# Altium PCB 2004 LCD.PcbDoc
Units mil, origin at the board's own origin, x right, y up, seen from the top; angles counter-clockwise.
Board outline 10000 x 5300 mil, 2 copper layers (Top Layer, Bottom Layer); 9 components, 35 nets, 157 pads, 34 vias.
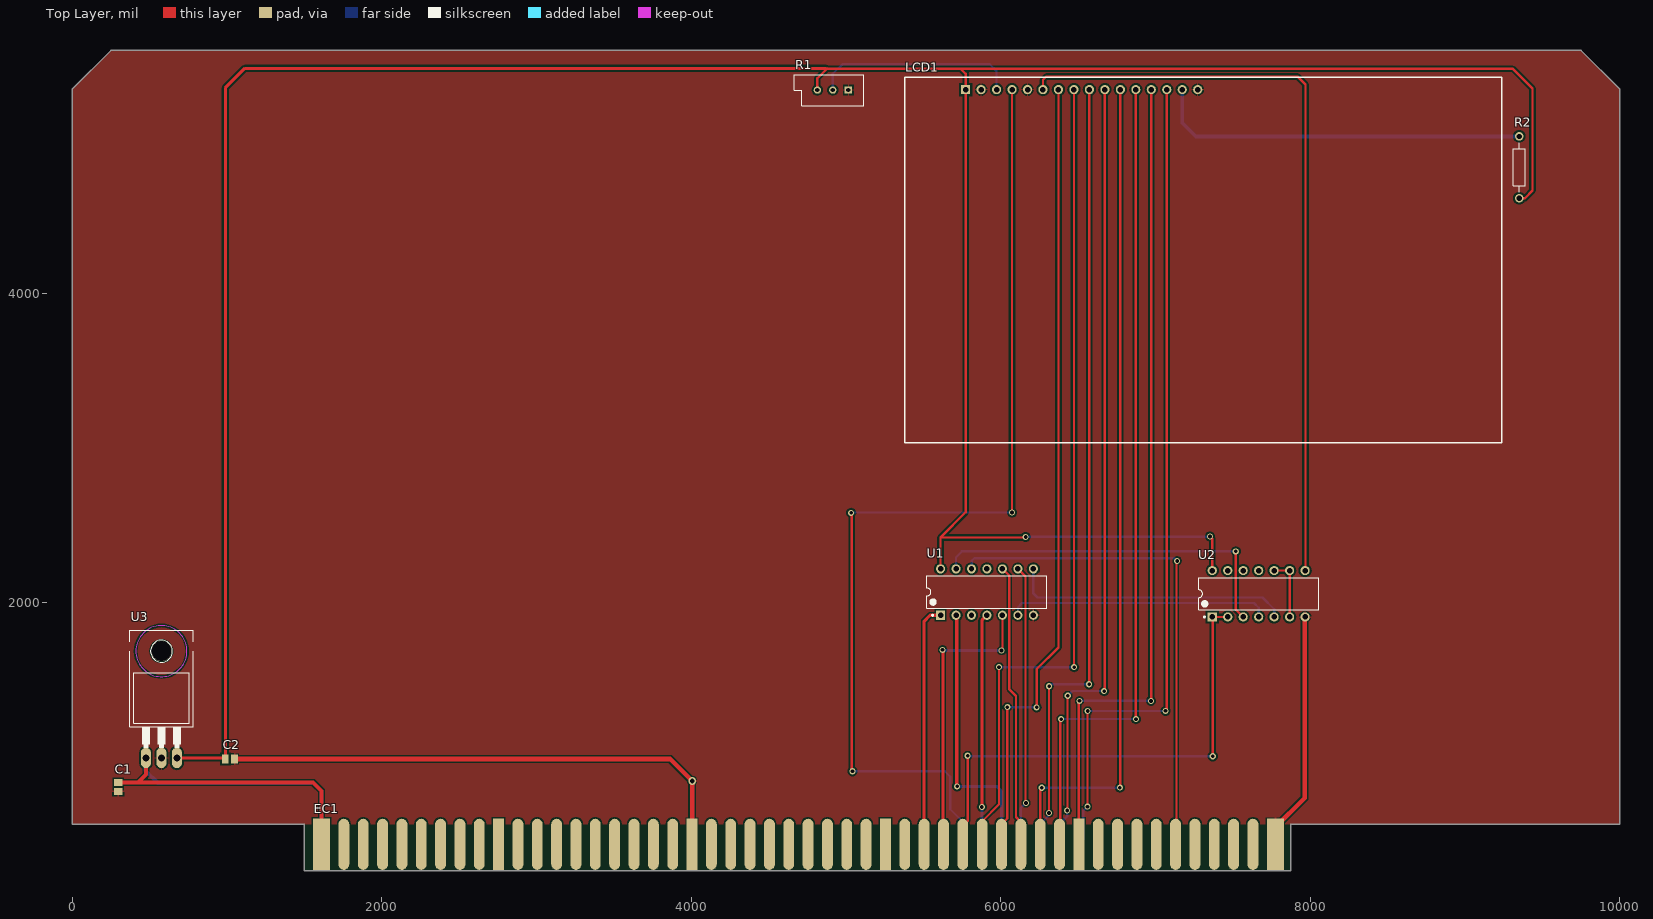
[diagram p0: Top Layer view]
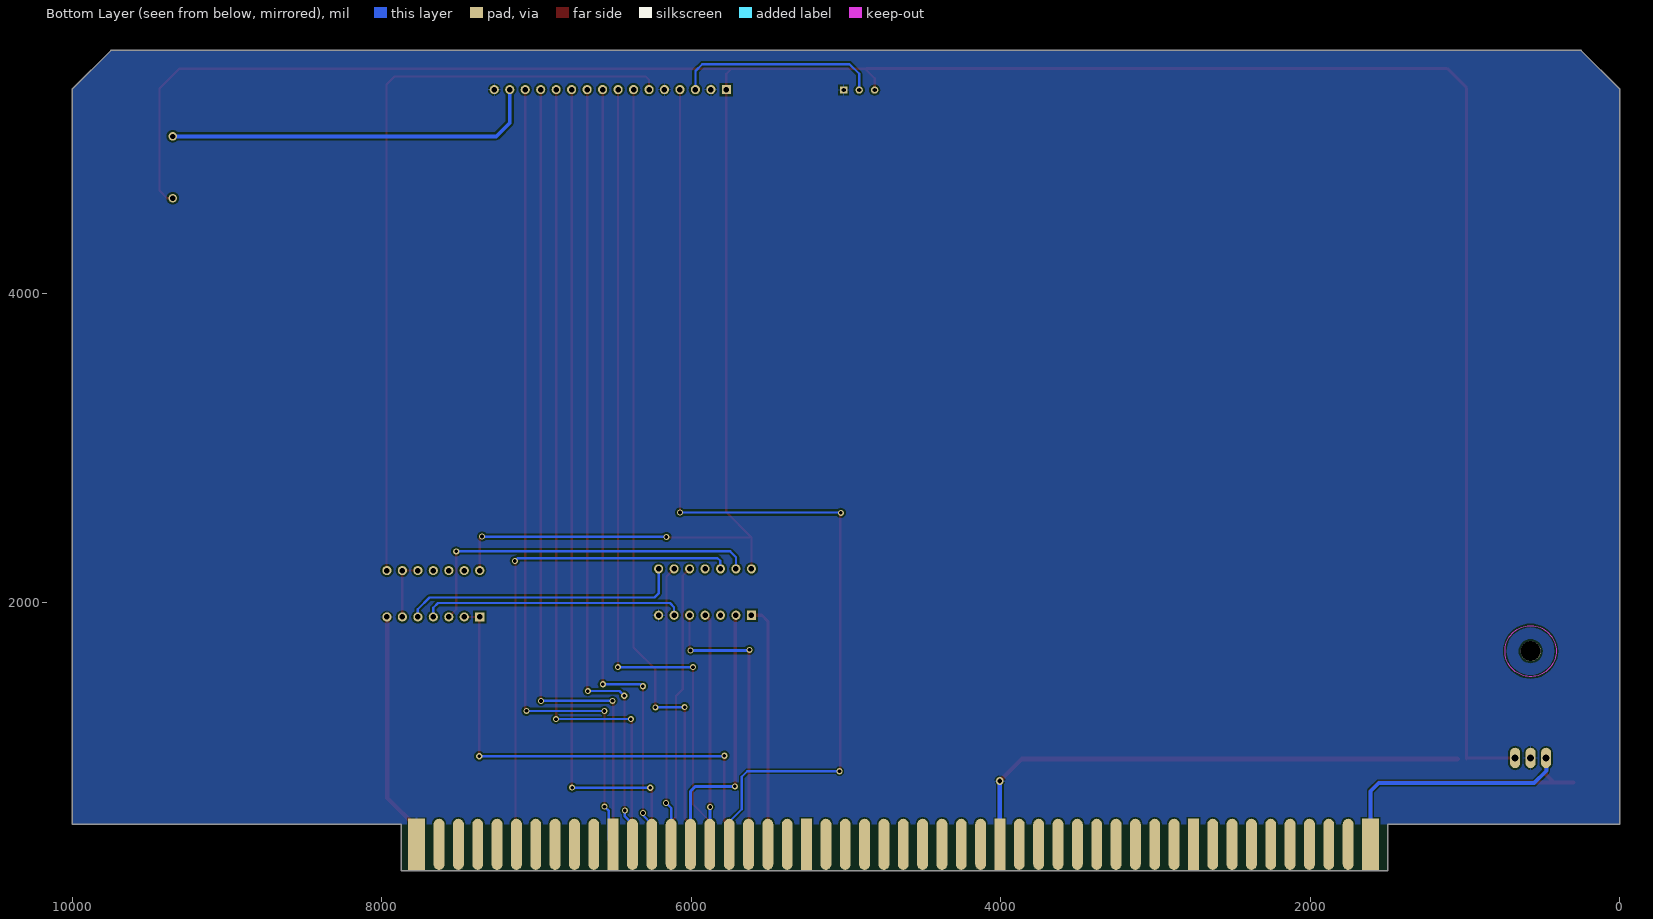
[diagram p1: Bottom Layer view, seen from below]

## Layer stack, top to bottom
Top Solder: solder mask 0.4, Solder Resist, Dk 3.5
Top Layer: signal copper 1.4
Dielectric 1: dielectric 12.6, FR-4, Dk 4.8
Bottom Layer: signal copper 1.4
Bottom Solder: solder mask 0.4, Solder Resist, Dk 3.5

## Board outline
0,570 1500,570 1500,270 7875,270 7875,570 10000,570 10000,5320 9750,5570 250,5570 0,5320

## Design rules (kind name [scope] priority, off if disabled: settings)
Clearance [All] p1: gap=8 ignorepadtopadclearanceinfootprint=TRUE except(12: Arc-Fill Arc-Poly Arc-Region Track-Fill Track-Poly Track-Region SMDPad-Fill SMDPad-Poly SMDPad-Region THPad-Fill THPad-Poly THPad-Region Via-Fill Via-Poly Via-Region Fill-Fill Fill-Poly Fill-Region Poly-Poly Poly-Region Region-Region)
PolygonConnect [All] p1: connectstyle=Relief reliefconductorwidth=10 reliefentries=4 polygonreliefangle="90 Angle" airgapwidth=10
RoutingVias [All] p1: holewidth=15.75 width=31.5 viastyle="Through Hole" minholewidth=11.81 minwidth=19.68 maxholewidth=78.74 maxwidth=50
SolderMaskExpansion [All] p1: expansion=4
Width "MCU Width" [WithinRoom('MCU')] p1: maxlimit=8 minlimit=6 preferedwidth=8
Width [All] p2: maxlimit=50 minlimit=8 preferedwidth=30
30 further rules are at their usual default settings.

## Components (designator, comment, footprint, x,y, rotation, side; value= is the part's Value field where it differs from the comment)
C1 "Cap Pol3" C0805 297,810 r270 top value=100pF
C2 "Cap Pol3" C0805 1018.53,991 r0 top value=100pF
EC1 "S100 Connector" S100 1610,440 r0 top locked
LCD1 "2004 LCD" 2004LCD 5773,5317 r0 top
R1 "RPot" VR5 4915,5314 r180 top value=1K
R2 "Res2" AXIAL-0.4 9351,4815 r90 top value=1K
U1 "SN74LS21N" N0014A 5911,2070 r90 top
U2 "SN74LS00N" N0014A 7667,2059 r90 top
U3 "LM7805" *TO220 576,1248 r0 top

## Footprints (in the part's own frame and the unit in brackets; to place one, negate y for a bottom-side part, rotate by r counter-clockwise, add the part's x,y. Pads: shape width x height; smd on the part's side, far side on the other; paste and mask are expansions set on the pad)
2004LCD [mm]
  rect 1.5x1.5 hole 0.9: 1(0,0)
  round 1.5 hole 0.9: 2(2.54,0) 3(5.08,0) 4(7.62,0) 5(10.16,0) 6(12.7,0) 7(15.24,0) 8(17.78,0) 9(20.32,0) 10(22.86,0) 11(25.4,0) 12(27.94,0) 13(30.48,0) 14(33.02,0) 15(35.56,0) 16(38.1,0)
  silkscreen extent -10,-58 88,2
*TO220 [mil]
  oval 66x132 hole 44: 1(-100,-250) 2(0,-250) 3(100,-250)
  round 130 hole 130 unplated: None(0,440)
  Keep-Out Layer circle w0: c0,440 r165
  Keep-Out Layer circle w0: c0,440 r165
  Keep-Out Layer circle w0: c0,440 r165
  Keep-Out Layer circle w0: c0,440 r165
  Keep-Out Layer circle w0: c0,440 r165
  Keep-Out Layer circle w0: c0,440 r165
  silkscreen extent -205,-185 205,575
AXIAL-0.4 [mm] "Axial Device, Thru-Hole; 2 Leads; 0.4 in Pin Spacing"
  round 1.4 hole 0.85: 1(-5.08,0) 2(5.08,0)
  silkscreen extent -4.06,-1.02 4.06,1.02
C0805 [mm] "Chip Capacitor, Body 2.0x1.3mm, IPC High Density"
  rect 1.1x1.4 smd: 1(-0.75,0) 2(0.75,0)
  body extent -1.1,-0.72 1.1,0.72, height 1.4
N0014A [mm] "DIP, 14-Leads, Body 19.7x6.6mm, Pitch 2.54mm"
  rect 1.5x1.5 hole 0.9: 1(-3.81,7.62)
  round 1.5 hole 0.9: 2(-3.81,5.08) 3(-3.81,2.54) 4(-3.81,0) 5(-3.81,-2.54) 6(-3.81,-5.08) 7(-3.81,-7.62) 8(3.81,-7.62) 9(3.81,-5.08) 10(3.81,-2.54) 11(3.81,0) 12(3.81,2.54) 13(3.81,5.08) 14(3.81,7.62)
  silkscreen extent -3.93,-9.85 2.65,9.85, body extent -3.95,-9.85 3.95,9.85, height 5.08
S100 [mil]
  rect 110x330 smd: 1(0,0) 50(6165,0)
  oval 70x330 smd: 2(145,0) 3(270,0) 4(395,0) 5(520,0) 6(645,0) 7(770,0) 8(895,0) 9(1020,0) 11(1270,0) 12(1395,0) 13(1520,0) 14(1645,0) 15(1770,0) 16(1895,0) 17(2020,0) 18(2145,0) 19(2270,0) 21(2520,0) 22(2645,0) 23(2770,0) 24(2895,0) 25(3020,0) 26(3145,0) 27(3270,0) 28(3395,0) 29(3520,0) 31(3770,0) 32(3895,0) 33(4020,0) 34(4145,0) 35(4270,0) 36(4395,0) 37(4520,0) 38(4645,0) 39(4770,0) 41(5020,0) 42(5145,0) 43(5270,0) 44(5395,0) 45(5520,0) 46(5645,0) 47(5770,0) 48(5895,0) 49(6020,0)
  rect 70x330 smd: 10(1145,0) 20(2395,0) 30(3645,0) 40(4895,0)
  rect 110x330 smd far side: 51(0,0) 100(6165,0)
  oval 70x330 smd far side: 52(145,0) 53(270,0) 54(395,0) 55(520,0) 56(645,0) 57(770,0) 58(895,0) 59(1020,0) 61(1270,0) 62(1395,0) 63(1520,0) 64(1645,0) 65(1770,0) 66(1895,0) 67(2020,0) 68(2145,0) 69(2270,0) 71(2520,0) 72(2645,0) 73(2770,0) 74(2895,0) 75(3020,0) 76(3145,0) 77(3270,0) 78(3395,0) 79(3520,0) 81(3770,0) 82(3895,0) 83(4020,0) 84(4145,0) 85(4270,0) 86(4395,0) 87(4520,0) 88(4645,0) 89(4770,0) 91(5020,0) 92(5145,0) 93(5270,0) 94(5395,0) 95(5520,0) 96(5645,0) 97(5770,0) 98(5895,0) 99(6020,0)
  rect 70x330 smd far side: 60(1145,0) 70(2395,0) 80(3645,0) 90(4895,0)
VR5 [mm] "Thru-Hole; 3 Leads"
  rect 1.2x1.2 hole 0.7: 1(-2.54,0)
  round 1.2 hole 0.7: 2(0,0) 3(2.54,0)
  silkscreen extent -5.08,-2.54 6.35,2.54

## Part data
C1 C2: "Polarized Capacitor (Surface Mount)", LatestRevisionDate=29-May-2009, LatestRevisionNote="IPC-7351 Footprint Added.", PackageDescription="Chip Capacitor", PackageReference=C0805, Published=8-Jun-2000, Publisher="Altium Limited"
R1: "Potentiometer", LatestRevisionDate=17-Jul-2002, LatestRevisionNote="Re-released for DXP Platform.", PackageDescription="Variable Resistor, Thru-Hole; 3 Leads", PackageReference=VR5, Published=8-Jun-2000, Publisher="Altium Limited", Set Position=0.5, Sim Note="Enter the Resistance value and the set point into parameter fields."
R2: "Resistor", LatestRevisionDate=17-Jul-2002, LatestRevisionNote="Re-released for DXP Platform.", PackageDescription="Axial Device, Thru-Hole; 2 Leads; 0.4 in Pin Spacing", PackageReference=AXIAL-0.4, Published=8-Jun-2000, Publisher="Altium Limited"
U1: "Dual 4-input positive-AND gates, N0014A, TUBE", F @ Nom Voltage(Max)(Mhz)=35, Generic Part Number=SN74LS21, ICC @ Nom Voltage(Max)(mA)=0.0025, Manufacturer="Texas Instruments", Operating Temperature Range(C)="0 to 70", Rating=Catalog, Supplier Part Number 1=595-SN74LS21N, tpd @ Nom Voltage(Max)(ns)=15, Voltage(Nom)(V)=5, Bits(#)=2, ComponentLink1Description="Manufacturer URL", ComponentLink1URL=http://www.ti.com/, ComponentLink2Description=Datasheet, ComponentLink2URL=http://www.ti.com/lit/ds/symlink/sn74ls21.pdf, DatasheetVersion=SDLS139, Input Type=TTL, Output Drive (IOL/IOH)(Max)(mA)=-.04/8, Output Type=TTL, PackageReference=N0014A, PartNumber=SN74LS21N, Schmitt Trigger=No, Supplier 1=Mouser, Supplier 2=Digi-Key, Supplier Part Number 2=296-3672-5-ND, Technology Family=LS, VCC(Max)(V)=5.25, VCC(Min)(V)=4.75
U2: "Quad 2-input positive-NAND gates, N0014A, TUBE", F @ Nom Voltage(Max)(Mhz)=35, Generic Part Number=SN74LS00, ICC @ Nom Voltage(Max)(mA)=0.022, Manufacturer="Texas Instruments", Operating Temperature Range(C)="0 to 70", Rating=Catalog, Supplier Part Number 1=595-SN74LS00N, tpd @ Nom Voltage(Max)(ns)=22, Voltage(Nom)(V)=5, Bits(#)=4, Code_JEDEC=MS-001, ComponentLink1Description="Manufacturer URL", ComponentLink1URL=http://www.ti.com/, ComponentLink2Description=Datasheet, ComponentLink2URL=http://www.ti.com/lit/ds/symlink/sn74ls00.pdf, ComponentLink3Description="Package Specification", ComponentLink3URL=http://www.ti.com/lit/ml/mpdi002c/mpdi002c.pdf, DatasheetVersion=SDLS025B, Input Type=TTL, Output Drive (IOL/IOH)(Max)(mA)=0.4/-16, Output Type=TTL, PackageReference=N0014A, PartNumber=SN74LS00N, Schmitt Trigger=No, Supplier 1=Mouser, Supplier 2=Digi-Key, Supplier Part Number 2=296-1626-5-ND, Technology Family=LS, VCC(Max)(V)=5.25, VCC(Min)(V)=4.75
U3: "Power Management, Linear Regulators, Semiconductors and Actives", Package=None, Availability=Unavailable, MF="Fairchild Semiconductor", MP=LM7805, Price=None, SnapEDA_Link=https://www.snapeda.com/parts/LM7805/Fairchild%20Semiconductor/view-part/?ref=snap

## Via types
v1: diameter 39.37, hole 23.62, Top Layer to Bottom Layer, tented both sides, 33 vias
v2: diameter 50, hole 30, Top Layer to Bottom Layer, tented both sides, 1 vias

## Nets (pads, with @x,y where several pads share a name; then routed paths per layer and width w, separated by ;. In a path a pad name is that pad's centre, name@x,y a point inside that pad or via, vN(x,y) a via of type N, cw(c..) or ccw(c..) an arc to the next point about the centre after c; other vN are vias at no path point)
+5: C2.1 LCD1.1 R1.3 R2.1 U1.14 U2.14 U3.3 | length 19415.7
  Top Layer w15: C2.1@982,998 C2.1 ; R1.3 4815,5391 4875,5451 5741,5451 ; U1.14 5611,2423 ; v1(6161,2426) 6158,2423 5611,2423 ; v1(7352,2429) 7367,2414 U2.14 ; R2.1 9387.21,4615 9437,4664.79 9437,5324 9310,5451 5741,5451 ; 5611,2423 5773,2585 LCD1.1 5773,5419 5741,5451
  Top Layer w20: U3.3 C2.1@982,998 ; C2.1 989,5328 1115,5454 4872,5454 4875,5451
  Bottom Layer w15: v1(6161,2426) 6162.5,2427.5 7350.5,2427.5 v1(7352,2429)
A0: EC1.79
A1: EC1.80
A2: EC1.81
A3: EC1.31
A4: EC1.30
A5: EC1.29
A6: EC1.82
A7: EC1.83
A8: EC1.84 LCD1.4 | length 6564
  Top Layer w15: v1(5033,2582) 5037.5,2577.5 5037.5,916.5 v1(5042,912) ; v1(6073,2584) LCD1.4
  Bottom Layer w15: v1(5033,2582) 5035,2584 v1(6073,2584) ; v1(5042,912) 5638,912 5674,876 5674,666 5755,585 EC1.84
A9: EC1.34 U2.1 U2.2 | length 3169.6
  Top Layer w15: EC1.34 5755,560 5786,591 v1(5786,1012) ; v1(7370,1009) U2.1@7370,1906 ; U2.2 U2.1@7373,1909 ; U2.1@7370,1906 U2.1@7373,1909 ; U2.1@7370,1906 U2.1@7373,1909
  Bottom Layer w15: v1(5786,1012) 5789,1009 v1(7370,1009)
A10: EC1.37 U1.10 | length 1829.3
  Top Layer w15: U1.10 6056.03,2174.97 6056.03,1440.97 6099,1398 6099,615.88 6130,584.88 EC1.37
A11: EC1.87 U1.9 | length 1815.2
  Top Layer w15: U1.9 6160,2171 6160,710 v1(6163,707)
  Bottom Layer w15: EC1.87 6130,674 v1(6163,707)
A12: EC1.33 U1.5 | length 1871.6
  Top Layer w15: v1(5624,1696) v1@5627,1693 ; EC1.33@5627,443 EC1.33 ; v1(6005,1692) 6011,1698 U1.5
  Top Layer w20: EC1.33@5627,443 v1@5627,1693
  Bottom Layer w20: v1(5624,1696) 5628,1692 v1(6005,1692)
A13: EC1.85 U1.4 | length 1494.5
  Top Layer w20: v1(5878,681) 5878,685.27 5878,1887 U1.4
  Bottom Layer w20: v1(5878,681) 5879,680 5879,441 EC1.85
A14: EC1.86 U1.2 | length 1751.2
  Top Layer w20: U1.2 5715.8,1915.2 5715.8,816.2 v1(5718,814)
  Bottom Layer w20: v1(5718,814) 5973,814 6005,782 EC1.86
A15: EC1.32 U1.1 | length 1563.7
  Top Layer w20: EC1.32 5505,1882 5543,1920 U1.1
D0: EC1.36 LCD1.7 | length 5141.6
  Top Layer w15: EC1.36 6005,570 6043,608 v1(6043,1326) ; v1(6232,1325) 6232,1571 6373,1712 LCD1.7
  Bottom Layer w15: v1(6043,1326) 6231,1326 v1(6232,1325)
D1: EC1.35 LCD1.8 | length 5407.6
  Top Layer w15: EC1.35 5880,589 5989,698 v1(5989,1585) ; LCD1.8 6473,1586 v1(6474,1585)
  Bottom Layer w15: v1(5989,1585) v1(6474,1585)
D2: EC1.88 LCD1.9 | length 5152.2
  Top Layer w15: v1(6312,642) 6312,1460 v1(6313,1461) ; v1(6571,1474) 6573,1476 LCD1.9
  Bottom Layer w15: EC1.88 6255,570 6312,627 v1(6312,642) ; v1(6313,1461) 6326,1474 v1(6571,1474)
D3: EC1.89 LCD1.10 | length 5118.5
  Top Layer w15: v1(6429,658) 6431,660 6431,1398 v1(6433,1400) ; v1(6668,1430) 6673,1435 LCD1.10
  Bottom Layer w15: EC1.89 6380,570 6429,619 v1(6429,658) ; v1(6433,1400) 6463,1430 v1(6668,1430)
D4: EC1.38 LCD1.11 | length 5386.8
  Top Layer w15: EC1.38 6255,795 v1(6265,805) ; v1(6770,806) 6773,809 LCD1.11
  Bottom Layer w15: v1(6265,805) 6265.5,805.5 6769.5,805.5 v1(6770,806)
D5: EC1.39 LCD1.12 | length 5365.6
  Top Layer w15: EC1.39 6385.34,445.34 6385.34,1244.34 v1(6390,1249) ; LCD1.12 6873,1250 v1(6874,1249)
  Bottom Layer w15: v1(6390,1249) v1(6874,1249)
D6: EC1.40 LCD1.13 | length 5342.9
  Top Layer w15: EC1.40 6505,1363 v1(6509,1367) ; v1(6971,1366) 6973,1368 LCD1.13
  Bottom Layer w15: v1(6509,1367) 6509.5,1366.5 6970.5,1366.5 v1(6971,1366)
D7: EC1.90 LCD1.14 | length 5406.3
  Top Layer w15: v1(6561,683) 6561,1300 v1(6562,1301) ; v1(7065,1302) 7073,1310 LCD1.14
  Bottom Layer w15: EC1.90 6532.5,467.5 6532.5,654.5 v1(6561,683) ; v1(6562,1301) 6562.5,1301.5 7064.5,1301.5 v1(7065,1302)
GND: C1.2 C2.2 EC1.20 EC1.50 EC1.70 EC1.100 LCD1.2 LCD1.5 LCD1.16 R1.1 U1.7 U2.7 U3.2 | length 5384.1
  Top Layer w30: C2.2 3864,991 v2(4006,849) 4006,441 EC1.20 ; EC1.50 7775,550 7964,739 7964,1906 U2.7
  Bottom Layer w30: EC1.70 4005.5,440.5 4005.5,848.5 v2(4006,849)
LCD_EN: LCD1.6 U2.8 | length 4933.5
  Top Layer w15: LCD1.6 6273,5381 6294,5402 7918,5402 7970,5350 7970,2520 7970,2212 U2.8
NetC1_1: C1.1 EC1.1 EC1.51 U3.1 | length 3477.5
  Top Layer w25: C1.1 425.53,839.53 ; U3.1 476,890 425.53,839.53 ; EC1.1 1610,785 1555.47,839.53 425.53,839.53
  Bottom Layer w25: U3.1 474,996 474,915 553,836 1557,836 1610,783 EC1.51
NetLCD1_3: LCD1.3 R1.2 | length 1326.9
  Bottom Layer w15: R1.2 4915,5419 4977,5481 5929,5481 5973,5437 LCD1.3
NetLCD1_15: LCD1.15 R2.2 | length 2429
  Bottom Layer w25: LCD1.15 7173,5102 7260,5015 R2.2
NetU1_6: U1.6 U2.4 | length 1691
  Bottom Layer w15: U1.6 6111.03,1972.03 6138,1999 7636,1999 7667,1968 U2.4
NetU1_8: U1.8 U2.5 | length 1807.2
  Bottom Layer w15: U1.8 6211,2061 6237,2035 7691,2035 7767,1959 U2.5
NetU1_13: U1.13 U2.3 | length 2342.6
  Top Layer w15: v1(7519,2333) 7519,1957 U2.3
  Bottom Layer w15: U1.13 5711,2295 5749,2333 v1(7519,2333)
NetU2_6: U2.6 U2.9 U2.10 | length 400
  Top Layer w15: U2.10 U2.9 U2.6
SOUT: EC1.45 U1.12 | length 3229.5
  Top Layer w15: EC1.45 7135.34,445.34 7135.34,2266.34 v1(7140,2271)
  Bottom Layer w15: U1.12 5813.03,2222.03 5813.03,2272.03 5830,2289 7122,2289 v1(7140,2271)
pads on no net: EC1.2 EC1.3 EC1.4 EC1.5 EC1.6 EC1.7 EC1.8 EC1.9 EC1.10 EC1.11 EC1.12 EC1.13 EC1.14 EC1.15 EC1.16 EC1.17 EC1.18 EC1.19 EC1.21 EC1.22 EC1.23 EC1.24 EC1.25 EC1.26 EC1.27 EC1.28 EC1.41 EC1.42 EC1.43 EC1.44 EC1.46 EC1.47 EC1.48 EC1.49 EC1.52 EC1.53 EC1.54 EC1.55 EC1.56 EC1.57 EC1.58 EC1.59 EC1.60 EC1.61 EC1.62 EC1.63 EC1.64 EC1.65 EC1.66 EC1.67 EC1.68 EC1.69 EC1.71 EC1.72 EC1.73 EC1.74 EC1.75 EC1.76 EC1.77 EC1.78 EC1.91 EC1.92 EC1.93 EC1.94 EC1.95 EC1.96 EC1.97 EC1.98 EC1.99 U1.3 U1.11 U2.11 U2.12 U2.13 U3.None

## Polygon pours and split planes (outlines as drawn)
GND on Bottom Layer "GND_L02_P004" (solid, pour order 4): 0,571 1,570 10000,570 10000,5318 9750,5568 9750,5569 254,5569 252,5571 1,5320 0,5320
GND on Top Layer "GND_L01_P006" (solid, pour order 6): 0,571 1,570 10000,570 10000,5318 9750,5568 9750,5569 254,5569 252,5571 1,5320 0,5320

## Text inside footprints (layer, text, board x,y; h text height)
U3: Mechanical 4 "3" at 651.02,1238.16 h73.82; Mechanical 4 "2" at 550.96,1238.16 h73.82; Mechanical 4 "1" at 450.76,1238.16 h73.82; Mechanical 4 "3" at 651.02,1238.16 h73.82; Mechanical 4 "2" at 550.96,1238.16 h73.82; Mechanical 4 "1" at 450.76,1238.16 h73.82